# Altium PCB ECG 28.PcbDoc
Units mm, origin at the board's own origin, x right, y up, seen from the top; angles counter-clockwise.
Board outline 100 x 75 mm, 4 copper layers (Top Signal Layer, Power, GND, Bottom Signal Layer), stack 1.57 mm thick; 86 components, 53 nets, 215 pads, 0 vias.
Unrouted connection lines stored in the file: 25.
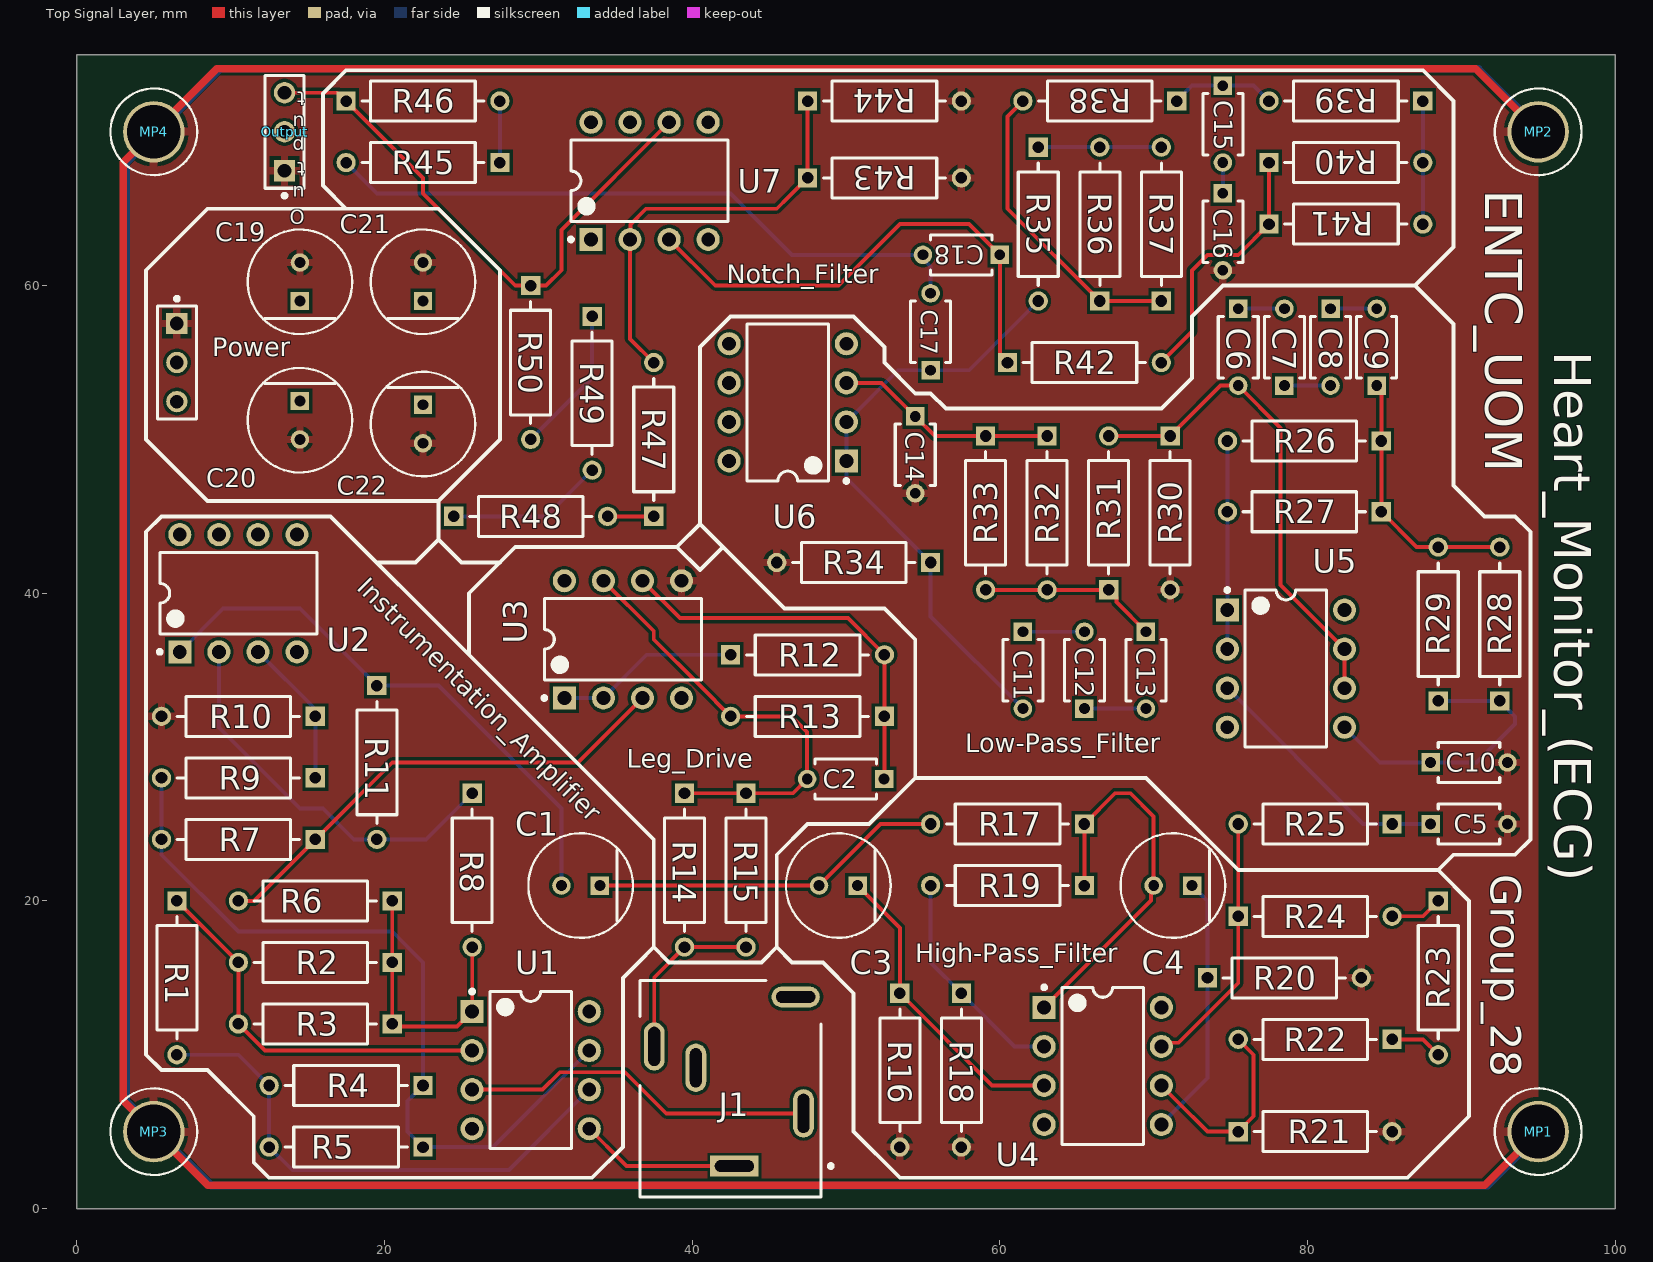
[diagram p0: Top Signal Layer view]
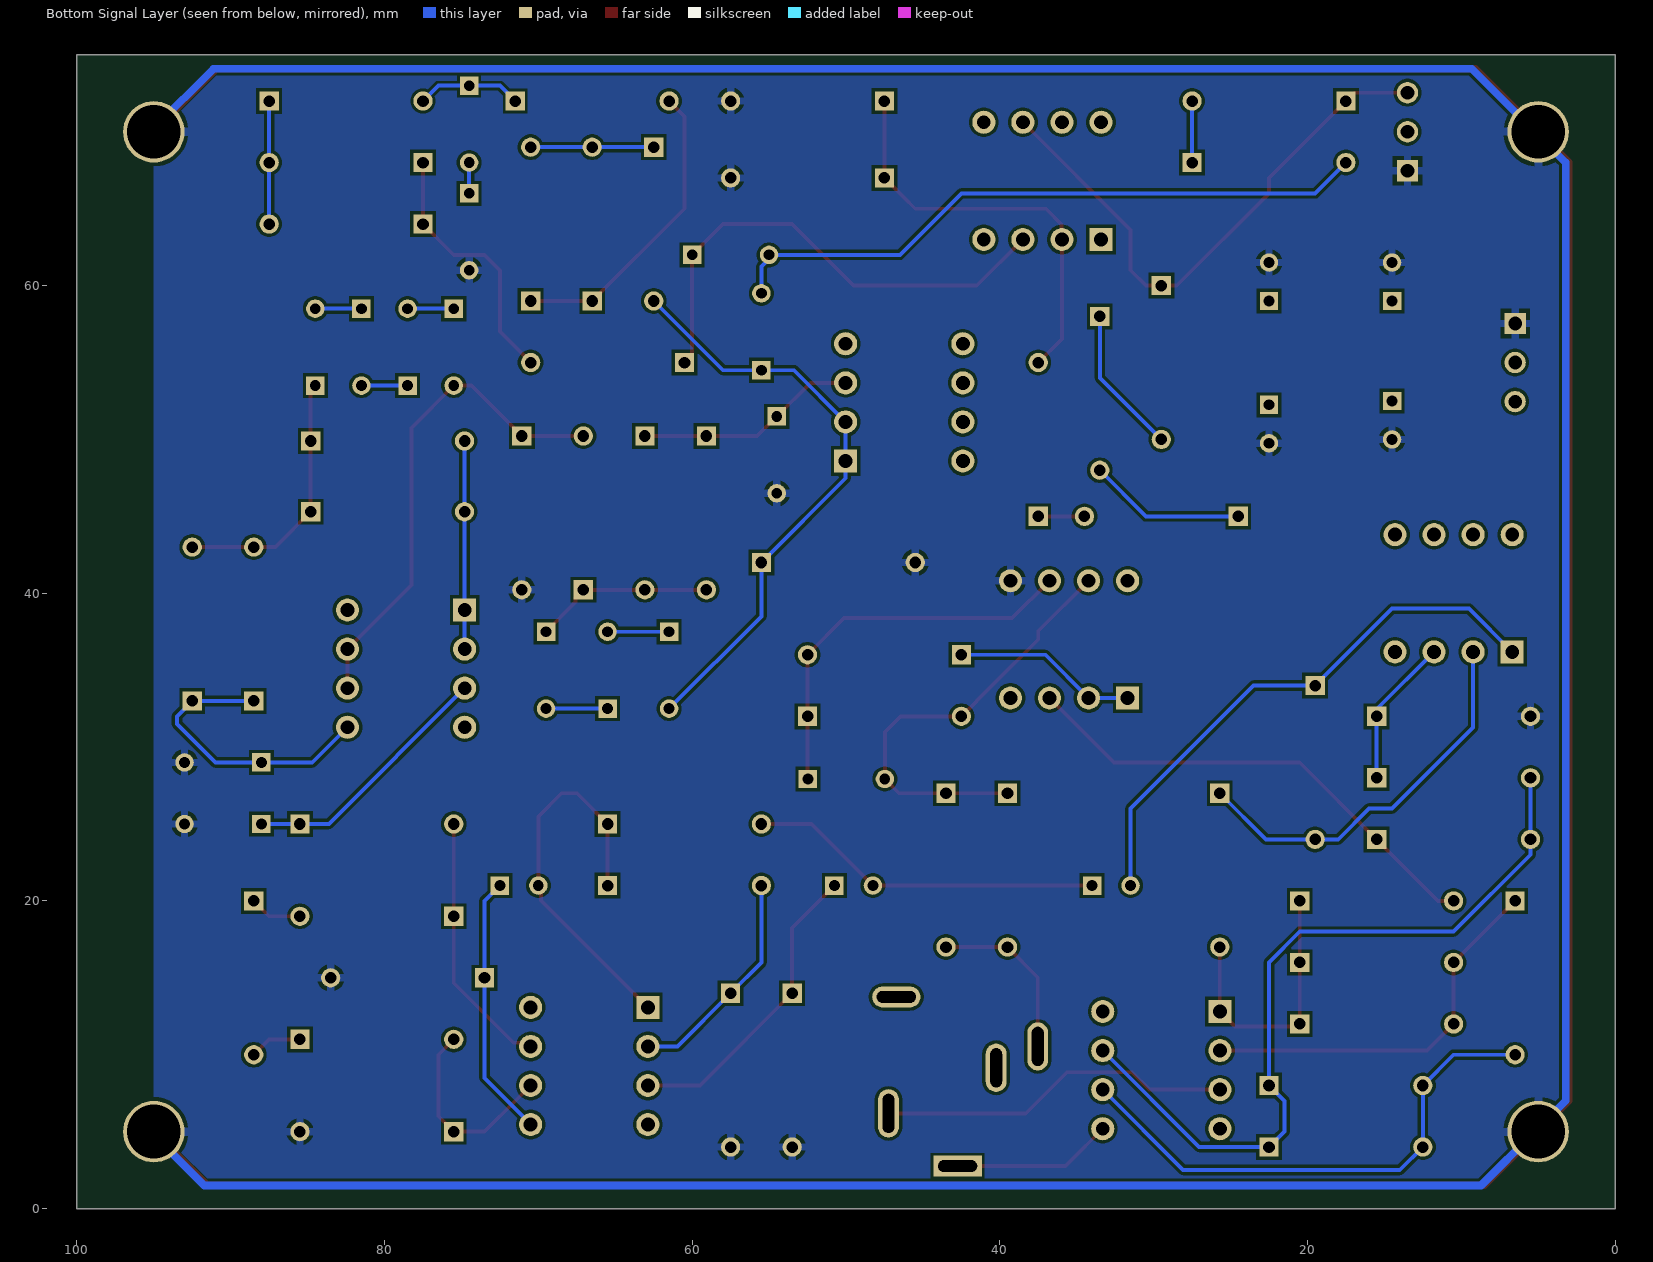
[diagram p1: Bottom Signal Layer view, seen from below]
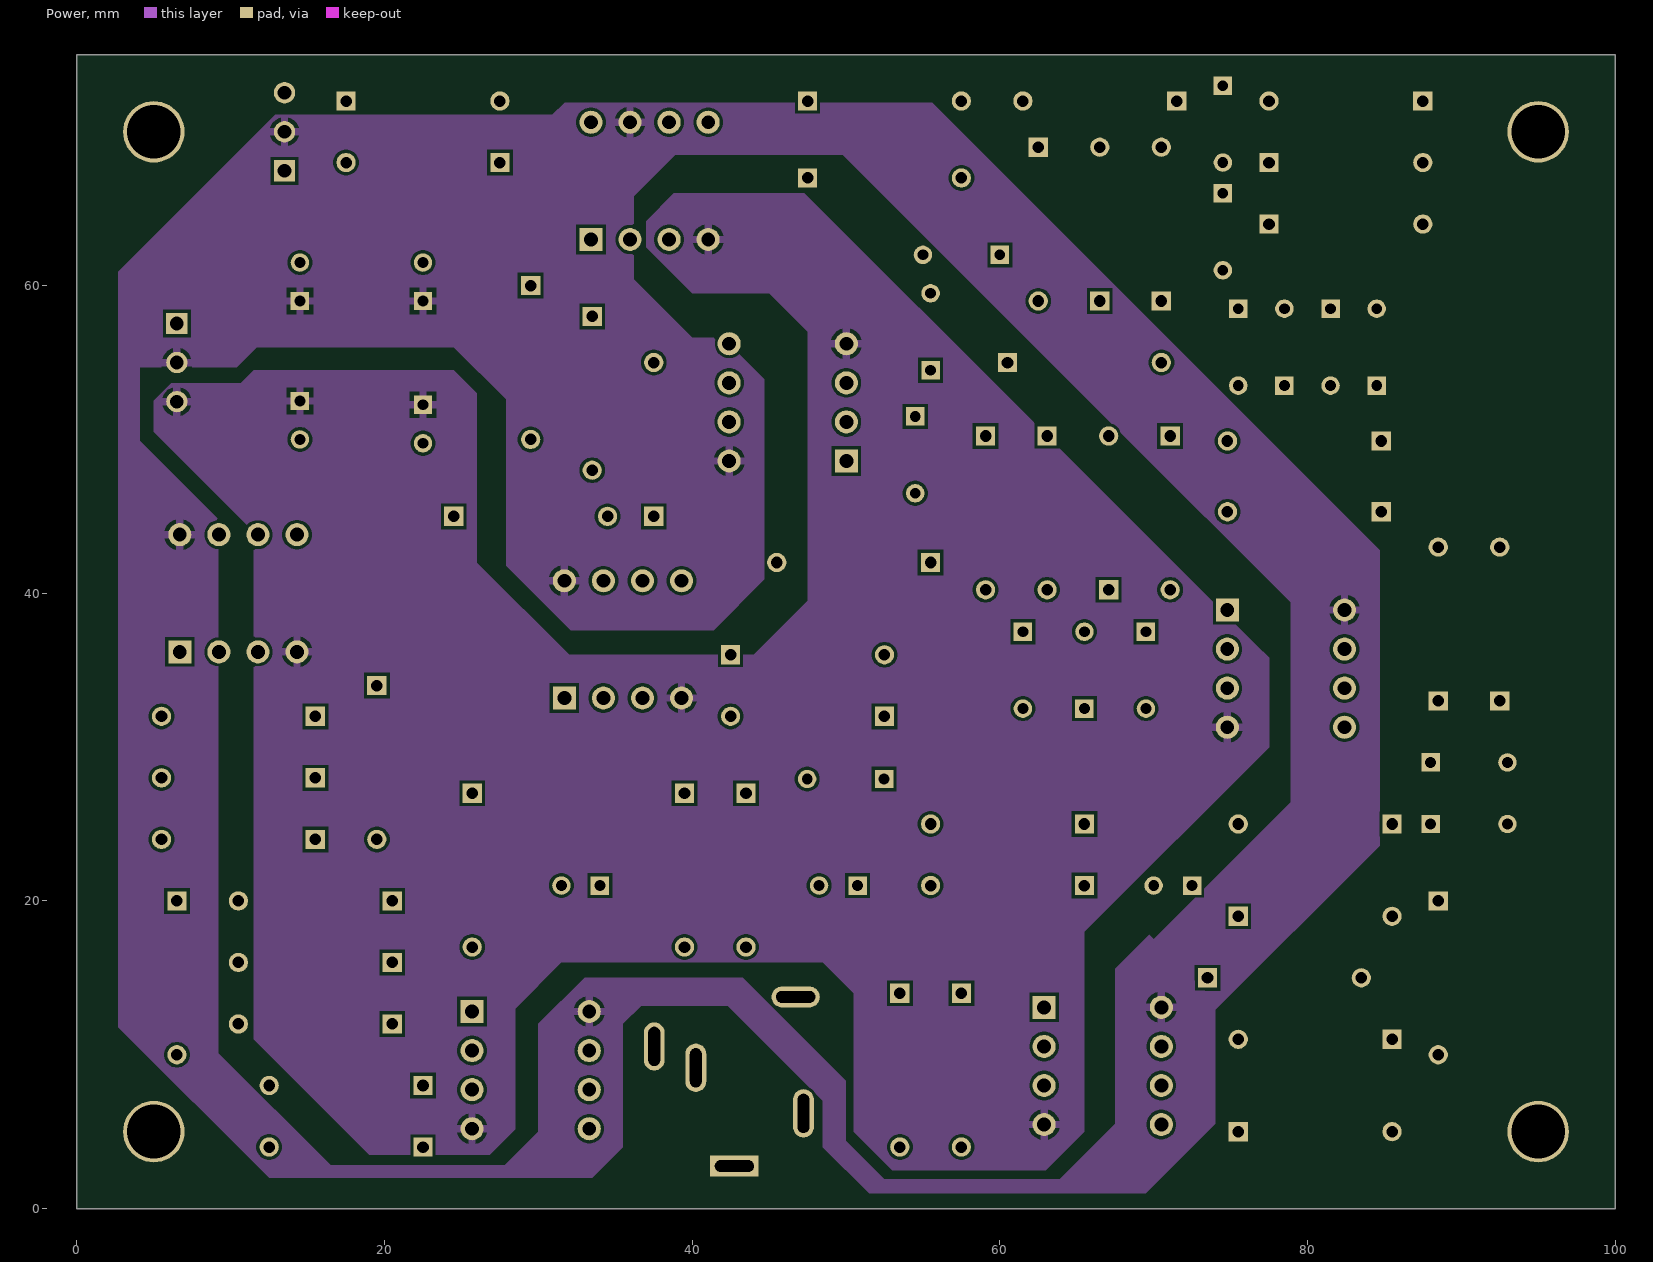
[diagram p2: Power]
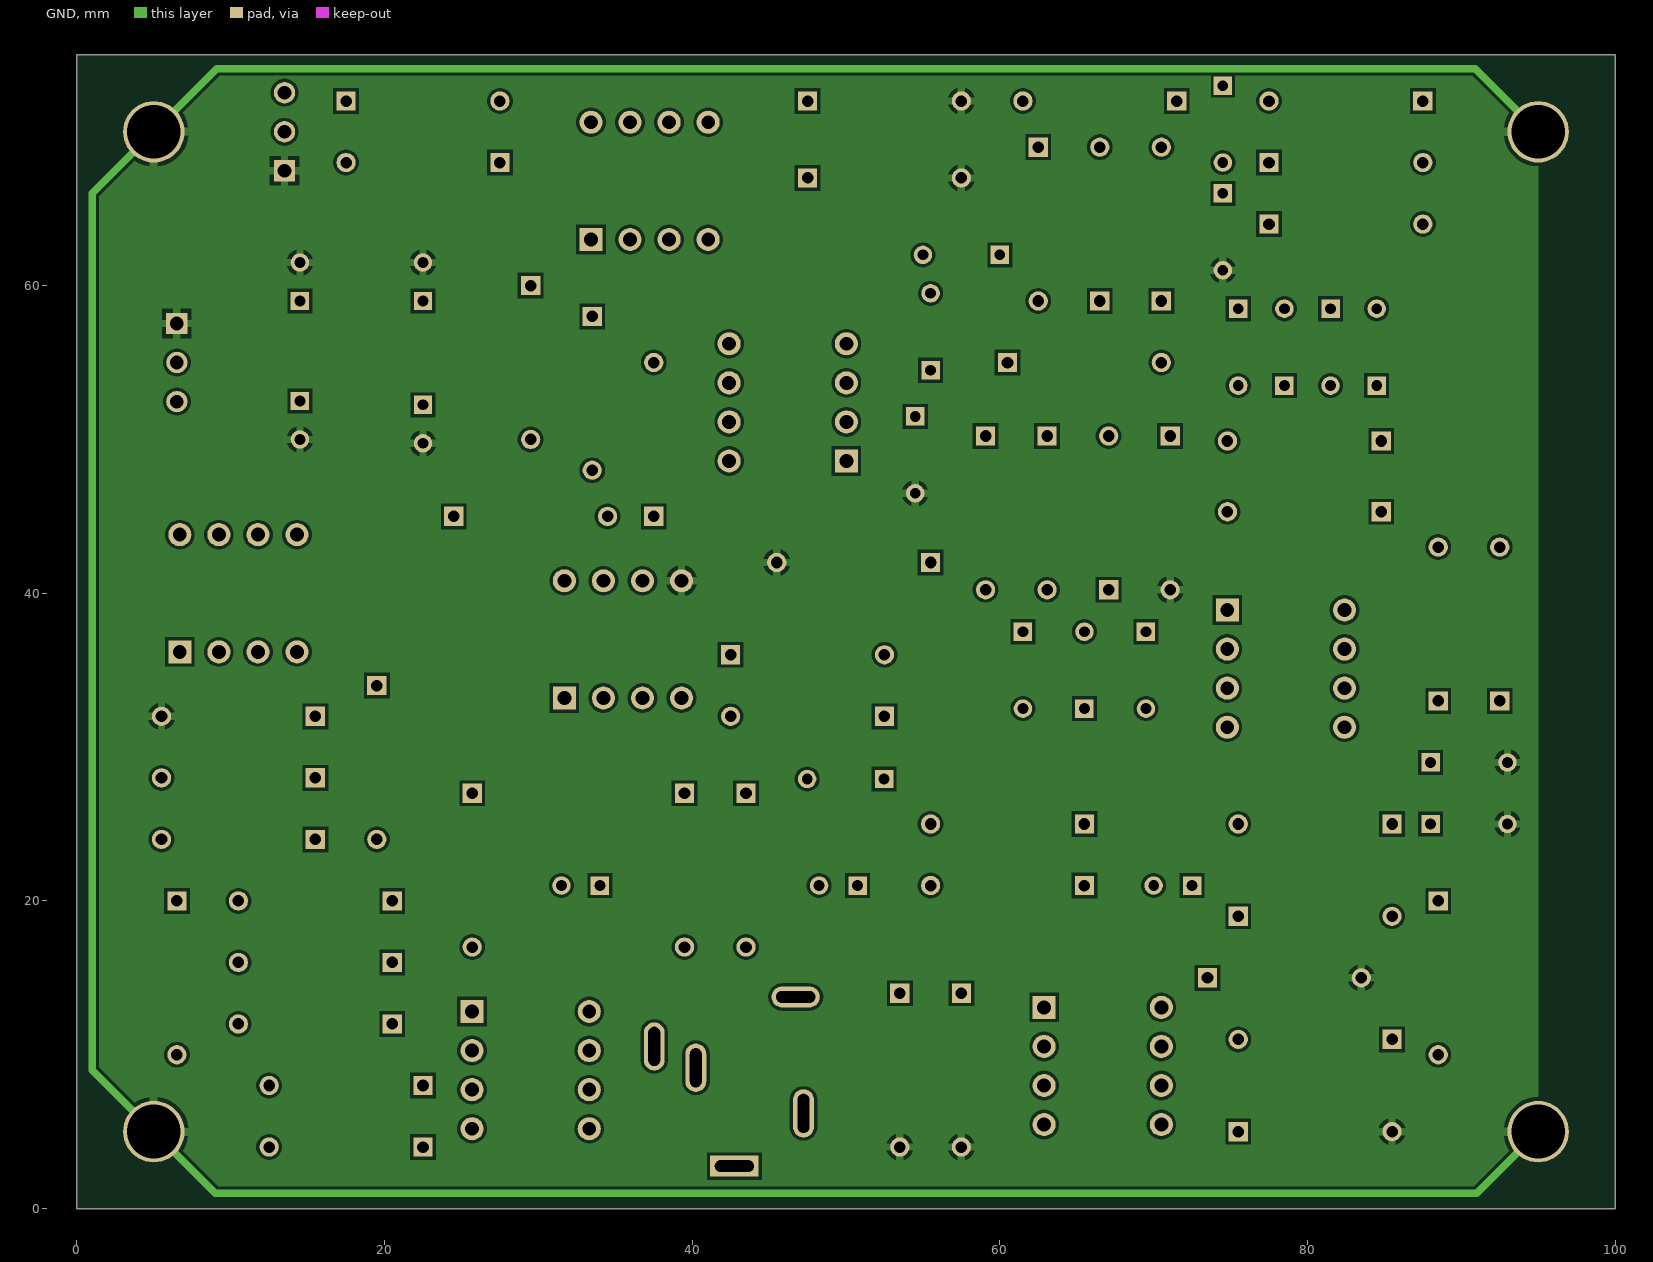
[diagram p3: GND]
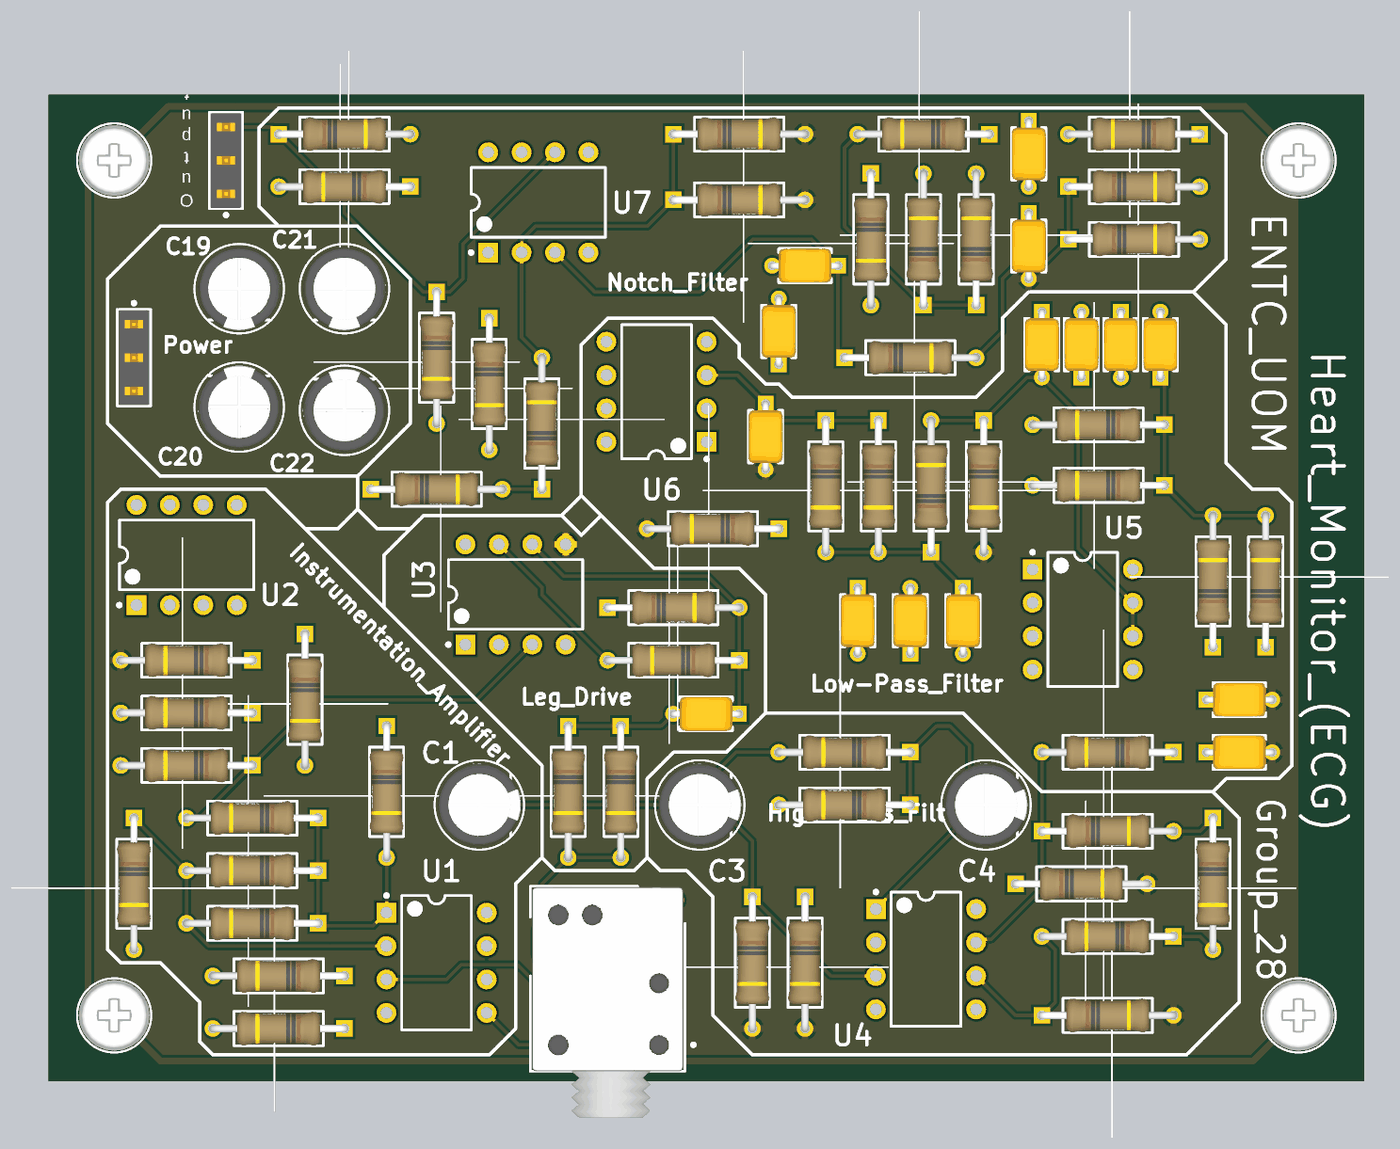
[diagram p4: 3D render of the assembled board from above, using the file's embedded part models]

## Layer stack, top to bottom
Top Solder: solder mask 0.0127, Solder Resist, Dk 3.8
Top Signal Layer: signal copper 0.035
Dielectric 1: prepreg 0.2, 7628, Dk 4.6
Power: signal copper 0.0175
Core: core 1.065, FR-4, Dk 4.5
GND: signal copper 0.0175
Dielectric 2: prepreg 0.2, 7628, Dk 4.6
Bottom Signal Layer: signal copper 0.035
Bottom Solder: solder mask 0.0127, Solder Resist, Dk 3.8

## Board outline
0,0 100,0 100,75 0,75

## Design rules (kind name [scope] priority, off if disabled: settings)
BoardOutlineClearance [All] p1: gap=0.2 ignorepadtopadclearanceinfootprint=FALSE except(0.4: Arc-SplitBarrior Arc-SplitContinuation Track-SplitBarrior Track-SplitContinuation SMDPad-SplitBarrior SMDPad-SplitContinuation THPad-SplitBarrior THPad-SplitContinuation Via-SplitBarrior Via-SplitContinuation Fill-SplitBarrior Fill-SplitContinuation Poly-SplitBarrior Poly-SplitContinuation Region-SplitBarrior Region-SplitContinuation Text-SplitBarrior Text-SplitContinuation)
Clearance "Clearance Bottom Layer" [OnLayer('Bottom Layer')] p1: gap=0.203 ignorepadtopadclearanceinfootprint=TRUE except(0.254: Arc-Text Track-Text SMDPad-Text THPad-Text Via-Text Fill-Text Poly-Text Region-Text Text-Text)
Clearance "Clearance Top Layer" [OnLayer('Top Layer')] p2: gap=0.203 ignorepadtopadclearanceinfootprint=TRUE except(0.254: Arc-Text Track-Text SMDPad-Text THPad-Text Via-Text Fill-Text Poly-Text Region-Text Text-Text)
Clearance [All] p3: gap=0.2 ignorepadtopadclearanceinfootprint=FALSE except(0.089: Arc-Arc Arc-Track Arc-SMDPad Track-Track Track-SMDPad SMDPad-SMDPad; 0.127: Arc-Via Track-Via SMDPad-Via THPad-Via Via-Via; 0.254: Arc-Text Track-Text SMDPad-Text THPad-Text Via-Text Fill-Text Poly-Text Region-Text Text-Text)
HoleSize [All] p1: absolutevalues=TRUE maxlimit=6.3 minlimit=0.2 maxpercent=80.000 minpercent=20.000
MinimumAnnularRing [All] p1: minimumring=0.076
MinimumSolderMaskSliver [All] p1: minsoldermaskwidth=0.1
PolygonConnect PolygonConnect_1 [All] p1: thpad.connectstyle=Relief thpad.reliefconductorwidth=0.508 thpad.reliefentries=4 thpad.polygonreliefangle="90 Angle" thpad.airgapwidth=0.254 smdpad.connectstyle=Relief smdpad.reliefconductorwidth=0.508 smdpad.reliefentries=4 smdpad.polygonreliefangle="90 Angle" smdpad.airgapwidth=0.254 via.connectstyle=Direct via.reliefconductorwidth=0.508 via.reliefentries=4 via.polygonreliefangle="90 Angle" via.airgapwidth=0.254
RoutingCorners [All] p1: cornerstyle=Round minsetback=2.54 maxsetback=2.54
RoutingVias [All] p1: holewidth=0.5 width=1 viastyle="Through Hole" minholewidth=0.2 minwidth=0.45 maxholewidth=1 maxwidth=2
SilkToSilkClearance [All] p1: silktosilkclearance=0.1
SilkToSolderMaskClearance [IsPad] p1: minsilkscreentomaskgap=0.1 clearancetoexposedcopper=TRUE
SolderMaskExpansion [All] p1: expansion=0.102 istentingtop=FALSE
Width [All] p1: maxlimit=2.54 minlimit=0.089 preferedwidth=0.381
25 further rules are at their usual default settings.

## Classes and differential pairs
component class notch+out: C15 C16 C17 C18 O R35 R36 R37 R38 R39 R40 R41 R42 R43 R44 R45 R46 R47 R48 R49 R50 U7
component class LowPassFilter: C5 C6 C7 C8 C9 C10 C11 C12 C13 C14 R25 R26 R27 R28 R29 R30 R31 R32 R33 R34 U5 U6
component class legdrive: C2 R12 R13 R14 R15 U3
component class InstrumentalAmplifier+in: C1 C19 C20 C21 C22 J1 MP1 MP2 MP3 MP4 Power R1 R2 R3 R4 R5 R6 R7 R8 R9 R10 R11 U1 U2
component class HighPassFilter: C3 C4 R16 R17 R18 R19 R20 R21 R22 R23 R24 U4

## Components (designator, comment, footprint, x,y, rotation, side; value= is the part's Value field where it differs from the comment)
C1 "100uF" FP-RAD-TH-D_6_3_0_5-L_11-MFG 32.75,21 r180 top
C2 ".1uF" FP-K15H5-MFG 49.975,27.925 r180 top
C3 "100uF" FP-RAD-TH-D_6_3_0_5-L_11-MFG 49.5,21 r180 top
C4 "100uF" FP-RAD-TH-D_6_3_0_5-L_11-MFG 71.25,21 r180 top
C5 ".1uF" FP-K15H5-MFG 90.5,25 r0 top
C6 ".1uF" FP-K15H5-MFG 75.5,56 r270 top
C7 ".1uF" FP-K15H5-MFG 78.5,56 r90 top
C8 ".1uF" FP-K15H5-MFG 81.5,56 r270 top
C9 ".1uF" FP-K15H5-MFG 84.5,56 r90 top
C10 ".1uF" FP-K15H5-MFG 90.5,29 r0 top
C11 ".1uF" FP-K15H5-MFG 61.5,35 r270 top
C12 ".1uF" FP-K15H5-MFG 65.5,35 r90 top
C13 ".1uF" FP-K15H5-MFG 69.5,35 r270 top
C14 ".1uF" FP-K15H5-MFG 54.5,49 r270 top
C15 ".1uF" FP-K15H5-MFG 74.5,70.5 r270 top
C16 ".1uF" FP-K15H5-MFG 74.5,63.5 r270 top
C17 ".1uF" FP-K15H5-MFG 55.5,57 r90 top
C18 ".1uF" FP-K15H5-MFG 57.5,62 r180 top
C19 "100uF" FP-RAD-TH-D_6_3_0_5-L_11-MFG 14.5,60.25 r90 top
C20 "100uF" FP-RAD-TH-D_6_3_0_5-L_11-MFG 14.5,51.25 r270 top
C21 "100uF" FP-RAD-TH-D_6_3_0_5-L_11-MFG 22.5,60.25 r90 top
C22 "100uF" FP-RAD-TH-D_6_3_0_5-L_11-MFG 22.5,51 r270 top
J1 "35RAPC3BH3" FP-35RAPC3BH3-MFG 42.5,6 r90 top
MP1 "9901" FP-9901-MFG 95,5 r0 top
MP2 "9901" FP-9901-MFG 95,70 r0 top
MP3 "9901" FP-9901-MFG 5,5 r0 top
MP4 "9901" FP-9901-MFG 5,70 r0 top
Output "87224-3" FP-87224-3-MFG 13.5,70 r90 top
Power "87224-3" FP-87224-3-MFG 6.5,55 r270 top
R1 "10K var" FP-CFR-25-MFG 6.5,15 r270 top
R2 "100K" FP-CFR-25-MFG 15.5,16 r180 top
R3 "100K" FP-CFR-25-MFG 15.5,12 r180 top
R4 "100K" FP-CFR-25-MFG 17.5,8 r180 top
R5 "100K" FP-CFR-25-MFG 17.5,4 r180 top
R6 "1M" FP-CFR-25-MFG 15.5,20 r180 top
R7 "1M" FP-CFR-25-MFG 10.5,24 r180 top
R8 "10K" FP-CFR-25-MFG 25.7,22 r270 top
R9 "10K" FP-CFR-25-MFG 10.5,28 r180 top
R10 "10K" FP-CFR-25-MFG 10.5,32 r180 top
R11 "10K" FP-CFR-25-MFG 19.5,29 r270 top
R12 "15K" FP-CFR-25-MFG 47.5,36 r0 top
R13 "1M" FP-CFR-25-MFG 47.5,32 r180 top
R14 "1M" FP-CFR-25-MFG 39.5,22 r270 top
R15 "1M" FP-CFR-25-MFG 43.5,22 r270 top
R16 "27K" FP-CFR-25-MFG 53.5,9 r270 top
R17 "27K" FP-CFR-25-MFG 60.5,25 r180 top
R18 "10K" FP-CFR-25-MFG 57.5,9 r270 top
R19 "10K" FP-CFR-25-MFG 60.5,21 r180 top
R20 "27K" FP-CFR-25-MFG 78.5,15 r0 top
R21 "1K" FP-CFR-25-MFG 80.5,5 r0 top
R22 "10K var" FP-CFR-25-MFG 80.5,11 r180 top
R23 "10K" FP-CFR-25-MFG 88.5,15 r270 top
R24 "10K" FP-CFR-25-MFG 80.5,19 r0 top
R25 "10K" FP-CFR-25-MFG 80.5,25 r180 top
R26 "10K" FP-CFR-25-MFG 79.8,49.9 r180 top
R27 "10K" FP-CFR-25-MFG 79.8,45.3 r180 top
R28 "10K" FP-CFR-25-MFG 92.5,38 r90 top
R29 "10K" FP-CFR-25-MFG 88.5,38 r90 top
R30 "10K" FP-CFR-25-MFG 71.075,45.225 r270 top
R31 "10K" FP-CFR-25-MFG 67.075,45.225 r90 top
R32 "10K" FP-CFR-25-MFG 63.075,45.225 r270 top
R33 "10K" FP-CFR-25-MFG 59.075,45.225 r270 top
R34 "10K" FP-CFR-25-MFG 50.5,42 r180 top
R35 "27K" FP-CFR-25-MFG 62.5,64 r270 top
R36 "10K" FP-CFR-25-MFG 66.5,64 r90 top
R37 "10K" FP-CFR-25-MFG 70.5,64 r90 top
R38 "1K Var" FP-CFR-25-MFG 66.5,72 r180 top
R39 "1K Var" FP-CFR-25-MFG 82.5,72 r180 top
R40 "10K" FP-CFR-25-MFG 82.5,68 r0 top
R41 "10K" FP-CFR-25-MFG 82.5,64 r0 top
R42 "27K" FP-CFR-25-MFG 65.5,55 r0 top
R43 "10K" FP-CFR-25-MFG 52.5,67 r0 top
R44 "10K" FP-CFR-25-MFG 52.5,72 r0 top
R45 "10K var" FP-CFR-25-MFG 22.5,68 r180 top
R46 "15K" FP-CFR-25-MFG 22.5,72 r0 top
R47 "1K" FP-CFR-25-MFG 37.5,50 r90 top
R48 "1K" FP-CFR-25-MFG 29.5,45 r0 top
R49 "1K" FP-CFR-25-MFG 33.5,53 r270 top
R50 "1K" FP-CFR-25-MFG 29.5,55 r270 top
U1 "LM4562NA/NOPB" P0008A 29.5,9 r0 top
U2 "LM4562NA/NOPB" P0008A 10.5,40 r90 top
U3 "TL072CP" P0008A 35.5,37 r90 top
U4 "TL072CP" P0008A 66.69,9.27 r0 top
U5 "TL072CP" P0008A 78.6,35.1 r0 top
U6 "TL072CP" P0008A 46.215,52.41 r180 top
U7 "TL071CP" P0008A 37.23,66.81 r90 top

## Footprints (in the part's own frame and the unit in brackets; to place one, negate y for a bottom-side part, rotate by r counter-clockwise, add the part's x,y. Pads: shape width x height; smd on the part's side, far side on the other; paste and mask are expansions set on the pad)
FP-35RAPC3BH3-MFG [mm]
  rect 1.362x3.14 hole 2.54 slot 0.762 at 0 deg paste-1000 mask+0: 1(-3.238,-0.241)
  rrect100% 3.14x1.362 hole 2.54 slot 0.762 at 90 deg paste-1000 mask+0: 2(4.541,4.966) 5(0.187,-4.735)
  rrect100% 1.362x3.14 hole 2.54 slot 0.762 at 0 deg paste-1000 mask+0: 4(7.76,-4.229)
  silkscreen extent -5.25,-6.64 8.81,5.88, body extent -8.91,-5.98 8.91,5.98, height 0.25
FP-9901-MFG [mm]
  round 4 hole 3.5 paste-1000 mask+0: ""(0,0)
  silkscreen extent -2.82,-2.82 2.82,2.82, body extent -2.92,-2.92 2.92,2.92, height 0.25
FP-87224-3-MFG [mil]
  rect 54.69x54.69 hole 35 paste-39370.1 mask+0: 1(-100,0)
  round 54.69 hole 35 paste-39370.1 mask+0: 2(0,0) 3(100,0)
  silkscreen extent -168,-50 145,50, body extent -148,-54 148,54, height 10
FP-CFR-25-MFG [mm]
  rect 1.25x1.25 hole 0.75 paste-1000 mask+0: 1(-5,0)
  round 1.25 hole 0.75 paste-1000 mask+0: 2(5,0)
  silkscreen extent -3.98,-1.3 3.97,1.3, body extent -5.72,-1.4 5.72,1.4, height 0.25
FP-K15H5-MFG [mm]
  rect 1.2x1.2 hole 0.7 paste-1000 mask+0: 1(-2.5,0)
  round 1.2 hole 0.7 paste-1000 mask+0: 2(2.5,0)
  silkscreen extent -2,-1.3 2,1.3, body extent -3.2,-1.4 3.2,1.4, height 0.25
FP-RAD-TH-D_6_3_0_5-L_11-MFG [mm]
  rect 1.2x1.2 hole 0.7 paste-1000 mask+0: 1(-1.25,0)
  round 1.2 hole 0.7 paste-1000 mask+0: 2(1.25,0)
  silkscreen extent -3.4,-3.4 3.4,3.4, body extent -3.5,-3.5 3.5,3.5, height 0.25
P0008A [mm] "DIP, 8-Leads, Body 10.15x6.6mm, Pitch 2.54mm"
  rect 1.5x1.5 hole 0.9: 1(-3.81,3.81)
  round 1.5 hole 0.9: 2(-3.81,1.27) 3(-3.81,-1.27) 4(-3.81,-3.81) 5(3.81,-3.81) 6(3.81,-1.27) 7(3.81,1.27) 8(3.81,3.81)
  silkscreen extent -3.93,-5.1 2.65,5.23, body extent -3.95,-5.07 3.95,5.07, height 5.08

## Part data
C1 C3 C4 C19 C20 C21 C22: library part CMP-05427-000237-1, "Aluminum Electrolytic Capacitors (Radial Lead Type) 4.7uF ±20% 160V", Capacitance=4.7uF, Case/Package=Radial, Dielectric Material=Aluminium, Max Operating Temperature=105°C, Min Operating Temperature=-25°C, Package Quantity=200, Ripple Current=43mA, Tolerance=20%, Voltage=160V, Construction=RADIAL, Diameter=6.3mm, Dissipation Factor=0.15%, Height=11.2mm, Height - Seated (Max)=0.48inch, Lead Diameter=0.5mm, Lead Free="Lead Free", Lead Pitch=2.5mm, Lead/Base Style=Straight, Length=11.2mm, Life (Hours)=2000Hour, Mount="Through Hole", Number of Pins=2, Packaging=Bulk, Radiation Hardening=No, REACH SVHC="No SVHC", Ripple Current (AC)=43mA, RoHS Compliant=Yes, Series=NHG, Termination=Radial, Voltage Rating=160V, Voltage Rating (DC)=160V, Weight=0.01lb, Width=0.25inch
C2 C5 C6 C7 C8 C9 C10 C11 C12 C13 C14 C15 C16 C17 C18: library part CMP-02417-000048-1, "CAP CER 0.1UF 50V X7R RADIAL", Capacitance=100nF, Case/Package=Dipped, Dielectric=X7R, Max Operating Temperature=125°C, Min Operating Temperature=-55°C, Package Quantity=5000, Tolerance=10%, Voltage=50V, Construction=RADIAL, Depth=2.5mm, Diameter=500um, Height=4mm, Height - Seated (Max)=0.1inch, Lead Diameter=0.5mm, Lead Length=30mm, Lead Pitch=5mm, Lead/Base Style="Formed Leads", Length=4mm, Mount="Through Hole", Packaging=Bulk, Radiation Hardening=No, RoHS Compliant=Yes, Series=K, Termination=Radial, Thickness=2.6mm, Voltage Rating=50V, Voltage Rating (DC)=50V, Weight=0.005644oz, Width=2.5mm
J1: library part CMP-47983-000003-1, "CONN JACK STEREO 3.5MM R/A", Body Color=Black, Package Quantity=1, Voltage Rating=500V, Body Material=Brass, Color=Black, Contact Material="Copper Alloy", Contact Plating=Silver, Gender=Female, Housing Material=PBT, Lead Free="Lead Free", Mount="Through Hole", Number of Ports=1, Number of Positions=3, Number of Terminals/Pins=3, Orientation="Right Angle", Packaging=Bulk, RoHS Compliant=Yes, Series=35, Shielding=Unshielded, Termination=Solder
MP1 MP2 MP3 MP4: library part CMP-19664-000002-1, "MACHINE SCREW PAN PHILLIPS 4-40", Package Quantity=100, Head Height=0.065inch, Lead Free="Lead Free", Length=0.44inch, Material="Stainless Steel", Mount=Screw, Outside Diameter=0.212inch, Series=-, Thread Size=#4-40
Output Power: library part CMP-2000-05697-2, "CONN HEADER VERT 3POS 2.54MM", Color=Black, Contact Current Rating=3A, Flammability Rating="UL94 V-0", High Temperature Housing=No, Max Operating Temperature=105°C, Min Operating Temperature=-65°C, Package Quantity=520, Approvals=CSA, Board Standoff="No (Without)", Connector Type=Plug, Contact Gender=Male, Contact Material=Bronze, Contact Mating Length=8.08mm, Contact Plating=Gold, Contact Post Length=0.125inch, Contact Protection="No (Without)", Contact Shape=Square, Contact Type="Male Pin", Current Rating=3A, Depth=2.54mm, ELV=Compliant, Gasket="No (Without)", High Speed Serial Data Connector=No, Housing Color=Black, Housing Material=Thermoplastic, Keyed=No, Lead Free="Lead Free", Length=7.21mm, Mating Alignment="No (Without)", Mating Connector Lock="No (Without)", Mount="Through Hole", Number of Contacts=3, Number of Positions=3, Number of Rows=1, Orientation=Straight, Packaging=Carton, PCB Mount Retention=Without, PCB Mounting Orientation=Vertical, PCB Thickness=1.397mm, Pitch=2.54mm, Radiation Hardening=No, RoHS Compliant=Yes, Row Spacing=2.54mm, Selectively Loaded="No (Without)", Series="AMPMODU MOD II", Stabilizers="No (Without)", Strain Relief="No (Without)", Termination="Through Hole"
R1 R2 R3 R4 R5 R6 R7 R8 R9 R10 R11 R12 R13 R14 R15 R16 R17 R18 R19 R20 R21 R22 R23 R24 R25 R26 R27 R28 R29 R30 R31 R32 R33 R34 R35 R36 R37 R38 R39 R40 R41 R42 R43 R44 R45 R46 R47 R48 R49 R50: library part CMP-03413-000009-1, "RES 10 OHM 1/4W 5% AXIAL", Case/Package=Axial, Max Operating Temperature=155°C, Max Power Dissipation=250mW, Min Operating Temperature=-55°C, Package Quantity=200, Resistance=10R, Resistor Type="Carbon Film", Temperature Coefficient=500ppm/°C, Tolerance=5%, Length=0.248inch, Number of Terminations=2, Packaging=Bulk, RoHS Compliant=Yes, Series="Carbon Film"
U1 U2: library part CMP-0057-00042-3, "Dual High Performance, High Fidelity Audio Operational Amplifier, 8-pin MDIP, Pb-Free", Manufacturer="Texas Instruments", PackageTopMarking=NSUZXYTTE#*LM*4562NA, PowerWise=Y, Code_JEDEC=MS-001-BA, ComponentLink1Description="Datasheet URL", ComponentLink1URL=http://www.ti.com/general/docs/lit/getliterature.tsp?genericPartNumber=LM4562&fileType=pdf, CompType="Audio IC", PackageDescription="MDIP, .365 x .250 x .130in, 8 Lead, .100in Pitch", PackageReference=P0008A, PinCount=8, RoHS=Y
U3 U4 U5 U6: library part CMP-0017-00950-2, "Dual Low-Noise JFET-Input General-Purpose Operational Amplifier, 7 to 36 V, 0 to 70 degC, 8-pin DIP (P8), Pb-Free (RoHS)", Manufacturer="Texas Instruments", Rating=Catalog, Total Supply Voltage(Max)(+5V is 5, +/-5V is 10)=36, Total Supply Voltage(Min)(+5V is 5, +/-5V is 10)=7, CMRR(Min)(dB)=70, Code_JEDEC=MS-001, ComponentLink1Description="Manufacturer URL", ComponentLink1URL=http://www.ti.com/, ComponentLink2Description=Datasheet, ComponentLink2URL=http://www.ti.com/lit/ds/symlink/tl072.pdf, ComponentLink3Description="Package Specification", ComponentLink3URL=http://www.ti.com/litv/pdf/mpdi001b, DatasheetVersion=SLOS080J, Eco-Plan="Pb-Free (RoHS)", GBW(Typ)(MHz)=3, IIB(Max)(pA)=200, Iq per channel(Max)(mA)=2.5, Mounting Technology="Through Hole", Number of Channels=2, Offset Drift(Typ)(uV/C)=18, PackageDescription="8-Pin Plastic In-Line, Body 9.59 x 6.35 mm, Pitch 2.54 mm", PackageReference=P0008A, PackageVersion="4040082/E, 04/2010", PartNumber=TL072CP, Slew Rate(Typ)(V/us)=13, Sub Family="General Purpose Amplifier, High Supply Voltage Amplifier (>=30V)", Vio (25C)(Max)(mV)=10, Vn at 1kHz(Typ)(nV/rtHz)=18
U7: library part CMP-0017-00972-2, "Low-Noise JFET-Input General-Purpose Operational Amplifier, 7 to 36 V, 0 to 70 degC, 8-pin DIP (P8), Pb-Free (RoHS)", Manufacturer="Texas Instruments", Rating=Military, Supplier Part Number 1=296-1775-5-ND, Total Supply Voltage(Max)(+5V is 5, +/-5V is 10)=36, Total Supply Voltage(Min)(+5V is 5, +/-5V is 10)=7, CMRR(Min)(dB)=70, Code_JEDEC=MS-001, ComponentLink1Description="Manufacturer URL", ComponentLink1URL=http://www.ti.com/, ComponentLink2Description=Datasheet, ComponentLink2URL=http://www.ti.com/lit/ds/symlink/tl071.pdf, ComponentLink3Description="Package Specification", ComponentLink3URL=http://www.ti.com/litv/pdf/mpdi001b, DatasheetVersion=SLOS080J, Eco-Plan="Pb-Free (RoHS)", GBW(Typ)(MHz)=3, IIB(Max)(pA)=200, Iq per channel(Max)(mA)=2.5, Mounting Technology="Through Hole", Number of Channels=1, Offset Drift(Typ)(uV/C)=18, PackageDescription="8-Pin Plastic In-Line, Body 9.59 x 6.35 mm, Pitch 2.54 mm", PackageReference=P0008A, PackageVersion="4040082/E, 04/2010", PartNumber=TL071CP, Slew Rate(Typ)(V/us)=13, Sub Family="General Purpose Amplifier, High Supply Voltage Amplifier (>=30V)", Supplier 1=Digi-Key, Vio (25C)(Max)(mV)=10, Vn at 1kHz(Typ)(nV/rtHz)=18

## Free pads (board coordinates)
  rrect100% 1.362x3.14 hole 2.54 slot 0.762 at 0 deg paste-1000 mask+0: 13(40.238,9.152)

## Nets (pads, with @x,y where several pads share a name; then routed paths per layer and width w, separated by ;. In a path a pad name is that pad's centre, name@x,y a point inside that pad or via, vN(x,y) a via of type N, cw(c..) or ccw(c..) an arc to the next point about the centre after c; other vN are vias at no path point)
+Vcc: C19.1 C21.1 Output.2 Power.2 U1.8 U2.8 U3.8 U4.8 U5.8 U6.8 U7.7
-Vcc: C20.1 C22.1 Power.3 U1.4 U2.4 U3.4 U4.4 U5.4 U6.4 U7.4
GND: C5.2 C10.2 C14.2 C16.2 C19.2 C20.2 C21.2 C22.2 MP1. MP2. MP3. MP4. Output.1 Power.1 R10.2 R16.2 R18.2 R20.2 R21.2 R30.2 R34.2 R43.2 R44.2 U3.5 | length 760.9
  Top Signal Layer w0.5: MP3.@5,5.038 3.019,7.019 3.019,68.019 9.104,74.104 90.934,74.104 MP2.@95,70.038 ; MP3.@5.038,5 8.519,1.519 91.519,1.519 MP1.
  GND w0.5: MP1. 91,1 9,1 MP3. 1,9 1,66 MP4. 9.104,74.104 90.896,74.104 MP2.
  Bottom Signal Layer w0.5: MP1. 95,4.782 91.718,1.5 8.718,1.5 5.218,5 MP3. 5,5.218 3.218,7 3.218,68 5,69.782 MP4. 5.218,70 9.322,74.104 91.114,74.104 95,70.218 MP2.
"high pass out": R24.1 R25.2 U4.7 | length 17
  Top Signal Layer w0.254: U4.7 70.738,10.778 71.619,10.778 75.5,14.659 R24.1 R25.2
InstrumentalOut: C1.1 C3.2 R17.2 | length 23.2
  Top Signal Layer w0.254: C1.1 C3.2 52.25,25 R17.2
LA: J1.5 U1.3 | length 23.1
  Top Signal Layer w0.254: U1.3 30.268,7.73 31.399,8.861 35.639,8.861 38.313,6.187 J1.5
LegIn: R6.2 R7.1 U3.3 | length 31.7
  Top Signal Layer w0.254: R6.2 10.506,20.006 11.506,20.006 R7.1 20.5,29 32.58,29 U3.3
LL: J1.2 R14.2 R15.2 | length 11.3
  Top Signal Layer w0.254: J1.2 37.534,15.034 R14.2 R15.2
"low pass out": C11.2 C17.1 R34.1 R35.2 U6.1 U6.2 | length 39.1
  Bottom Signal Layer w0.254: C11.2 55.5,38.5 R34.1 50.025,47.475 U6.1 U6.2 53.385,54.5 C17.1 58,54.5 R35.2
NetC1_2: C1.2 R11.1 U2.1 | length 36.4
  Bottom Signal Layer w0.254: U2.1 9.5,39 14.5,39 R11.1 23.5,34 31.5,26 C1.2
NetC2_1: C2.1 R12.2 R13.1 U3.6 | length 25.8
  Top Signal Layer w0.254: U3.6 39.199,38.381 50.119,38.381 R12.2 R13.1 52.5,27.95 C2.1
NetC2_2: C2.2 R13.2 R14.1 R15.1 U3.7 | length 29
  Top Signal Layer w0.254: U3.7 37.5,37.54 37.5,37 40.5,34 R13.2 46.45,32 47.475,30.975 C2.2 46.55,27 R15.1 R14.1
NetC3_1: C3.1 R16.1 U4.3 | length 20
  Top Signal Layer w0.254: C3.1 53.5,18.25 R16.1 59.5,8 U4.3
NetC4_1: C4.1 R20.1 U4.5 | length 17.2
  Bottom Signal Layer w0.254: U4.5 70.5,5.5 73.5,8.5 R20.1 73.5,20 C4.1
NetC4_2: C4.2 R17.1 R19.1 U4.1 | length 25.3
  Top Signal Layer w0.254: U4.1 69.819,20.019 69.819,20.819 C4.2 70,25.5 68.5,27 67.5,27 R17.1 R19.1
NetC5_1: C5.1 R25.1 U5.3 | length 16.9
  Bottom Signal Layer w0.254: U5.3 83.62,25 R25.1 C5.1
NetC6_1: C6.1 C7.2 | length 3
  Bottom Signal Layer w0.254: C6.1 C7.2
NetC6_2: C6.2 R30.1 R31.2 U5.6 U5.7 | length 32.3
  Top Signal Layer w0.254: R31.2 R30.1 74.35,53.5 C6.2 78.249,50.751 78.249,40.525 78.255,40.525 U5.7 U5.6
NetC7_1: C7.1 C8.2 | length 3
  Bottom Signal Layer w0.254: C7.1 C8.2
NetC8_1: C8.1 C9.2 | length 3
  Bottom Signal Layer w0.254: C8.1 C9.2
NetC9_1: C9.1 R26.1 R27.1 R28.2 R29.2 | length 17
  Top Signal Layer w0.254: C9.1 84.8,53.2 R26.1 R27.1 87.1,43 R29.2 R28.2
NetC10_1: C10.1 R28.1 R29.1 U5.5 | length 19
  Bottom Signal Layer w0.254: U5.5 84.7,29 C10.1 91,29 93.5,31.5 93.5,32 R28.1 R29.1
NetC11_1: C11.1 C12.2 | length 4
  Bottom Signal Layer w0.254: C11.1 C12.2
NetC12_1: C12.1 C13.2 | length 4
  Bottom Signal Layer w0.254: C12.1 C13.2
NetC13_1: C13.1 R31.1 R32.2 R33.2 | length 11.7
  Top Signal Layer w0.254: R33.2 R32.2 R31.1 67.573,39.727 67.573,39.427 C13.1
NetC14_1: C14.1 R32.1 R33.1 U6.3 | length 14.5
  Top Signal Layer w0.254: U6.3 52.32,53.68 C14.1 55.775,50.225 R33.1 R32.1
NetC15_1: C15.1 R38.1 R39.2 | length 6.8
  Bottom Signal Layer w0.254: R38.1 72.5,73 76.5,73 R39.2
NetC15_2: C15.2 C16.1 | length 2
  Bottom Signal Layer w0.254: C16.1 C15.2
NetC17_2: C17.2 C18.2 R45.2 | length 42.7
  Bottom Signal Layer w0.254: R45.2 19.5,66 42.5,66 46.5,62 C18.2 55,61.744 55.5,61.244 C17.2
NetC18_1: C18.1 R42.1 U7.3 | length 32.4
  Top Signal Layer w0.254: U7.3 41.5,60 49.5,60 53.5,64 58,64 C18.1 60,55.5 R42.1
NetR1_1: R1.1 R2.2 R3.2 U1.2 | length 25.6
  Top Signal Layer w0.254: R1.1 R2.2 10.5,13 R3.2 12.23,10.27 U1.2
NetR1_2: R1.2 R4.2 R5.2 U1.6 | length 34.4
  Bottom Signal Layer w0.254: R1.2 10.5,10 R4.2 R5.2 14,2.5 28.08,2.5 U1.6
NetR2_1: R2.1 R3.1 R6.1 R8.2 U1.1 | length 17.9
  Top Signal Layer w0.254: R6.1 R2.1 20.5,13 R3.1 20.672,11.828 24.708,11.828 25.7,12.82 R8.2
NetR4_1: R4.1 R5.1 R7.2 R9.2 U1.7 | length 51.1
  Bottom Signal Layer w0.254: R9.2 R7.2 5.5,23 10.5,18 20.5,18 22.5,16 R4.1 21.5,7 21.5,5 R5.1 27.04,4 U1.7
NetR8_1: R8.1 R11.2 U2.2 | length 25.6
  Bottom Signal Layer w0.254: U2.2 9.23,31.27 14.5,26 16,26 18,24 22.7,24 R8.1
NetR9_1: R9.1 R10.1 U2.3 | length 9.7
  Bottom Signal Layer w0.254: U2.3 15.5,32.46 R9.1
NetR12_1: R12.1 U3.1 U3.2 | length 12
  Bottom Signal Layer w0.254: U3.1 U3.2 37.04,36 R12.1
NetR18_1: R18.1 R19.2 U4.2 | length 14.6
  Bottom Signal Layer w0.254: R19.2 55.5,16 R18.1 60.96,10.54 U4.2
NetR21_1: R21.1 R22.2 U4.6 | length 13.1
  Top Signal Layer w0.254: U4.6 71.5,7 73.5,5 R21.1 76.5,6 76.5,8 76.5,10 R22.2
NetR22_1: R22.1 R23.2 | length 3.4
  Top Signal Layer w0.254: R22.1 87.5,11 R23.2
NetR23_1: R23.1 R24.2 | length 3.4
  Top Signal Layer w0.254: R24.2 87.5,19 R23.1
NetR26_2: R26.2 R27.2 U5.1 U5.2 | length 13.5
  Bottom Signal Layer w0.254: U5.2 74.795,36.375 74.795,49.895 R26.2
NetR35_1: R35.1 R36.2 R37.2 | length 8
  Bottom Signal Layer w0.254: R35.1 R36.2 R37.2
NetR36_1: R36.1 R37.1 R38.2 | length 19.9
  Top Signal Layer w0.254: R38.2 60.5,71 60.5,65 R36.1 R37.1
NetR39_1: R39.1 R40.2 R41.2 | length 8
  Bottom Signal Layer w0.254: R41.2 R40.2 R39.1
NetR40_1: R40.1 R41.1 R42.2 | length 17.1
  Top Signal Layer w0.254: R42.2 70.5,55.023 72.488,57.012 72.488,60.988 73.5,62 75.5,62 R41.1 R40.1
NetR43_1: R43.1 R44.1 R47.2 U7.2 | length 27.4
  Top Signal Layer w0.254: R47.2 35.96,56.54 U7.2 35.982,63.022 35.982,63.982 37,65 45.5,65 46.251,65.751 R43.1 R44.1
NetR45_1: R45.1 R46.2 | length 4
  Bottom Signal Layer w0.254: R45.1 R46.2
NetR47_1: R47.1 R48.2 | length 3
  Top Signal Layer w0.254: R48.2 R47.1
NetR48_1: R48.1 R49.2 | length 10.2
  Bottom Signal Layer w0.254: R48.1 30.5,45 R49.2
NetR49_1: R49.1 R50.2 | length 9.7
  Bottom Signal Layer w0.254: R50.2 33.5,54 R49.1
Output: Output.3 R46.1 R50.1 U7.6 | length 36.7
  Top Signal Layer w0.254: Output.3 16.96,72.54 R46.1 22.5,67 22.5,66 28.5,60 R50.1 30.5,60 31.5,61 31.5,63.62 U7.6
RA: J1.1 U1.5 | length 13.5
  Top Signal Layer w0.254: 35.5,3 U1.5 35.738,2.762 J1.1
pads on no net: J1.4 U2.5 U2.6 U2.7 U6.5 U6.6 U6.7 U7.1 U7.5 U7.8

## Polygon pours and split planes (outlines as drawn)
GND on Bottom Signal Layer "GND_L04_P013" (solid, pour order 13): 95,70 91,74 9,74 3,68 3,7 8.5,1.5 91.5,1.5 95,5
GND on GND "GND_L03_P008" (solid, pour order 8): 4.915,70.101 1,66.187 1,9 9.5,0.5 9,1 91,1 95,5 95,70 91,74 8.5,74 5,70.5 5,70
GND on Top Signal Layer "GND_L01_P014" (solid, pour order 14): 95,70 91,74 9,74 3,68 3,7 8.5,1.5 91.5,1.5 92,2 95,5
-Vcc on Power "-VCC_L02_P015" (solid, pour order 15): 5,52.5 6.15,53.65 10.65,53.65 11.5,54.5 24.5,54.5 26,53 26,42 32,36 44,36 47.5,39.5 47.5,57 45,59.5 40,59.5 37,62.5 37,64.2 38.8,66 47.3,66 77.5,35.8 77.5,30 65.5,18 65.5,5 63,2.5 53,2.5 50.5,5 50.5,14 48.5,16 31.5,16 28.5,13 28.5,5.15 26.85,3.5 19,3.5 11.5,11 11.5,44 5,50.5
+Vcc on Power "+VCC_L02_P019" (solid, pour order 19): 4.1,49.8 4.1,55.6 2.6,55.6 2.7,55.5 2.7,49.7 4,49.7
+Vcc on Power "+VCC_L02_P018" (solid, pour order 18): 69.2,16.7 73.5,12.4 84.7,23.6 84.7,42.8 55.6,71.9 31.7,71.9 30.9,71.1 12.9,71.1 2.7,60.9 2.7,54.7 10.4,54.7 11.7,56 24.5,56 27.9,52.6 27.9,41.8 32.1,37.6 41.4,37.6 44.7,40.9 44.7,53.9 42,56.6 40,56.6 36.2,60.4 36.2,65.8 38.9,68.5 49.8,68.5 78.9,39.4 78.9,26.4
+Vcc on Power "+VCC_L02_P017" (solid, pour order 17): 2.7,51.3 9.2,44.8 9.2,10.1 16.5,2.8 27.8,2.8 30,5 30,12 33,15 43.3,15 50,8.3 50,4.4 52.5,1.9 63.9,1.9 67.5,5.5 67.5,15.6 69.7,17.8 74,13.5 74,5.5 69.5,1 51.5,1 48.5,4 48.5,7 42.3,13.2 36.7,13.2 35.5,12 35.5,4 33.5,2 12.5,2 2.7,11.8

## Silkscreen, mask and mechanical layers (free items; w line width, h text height)
Top Overlay:
  lines w0.254: 18.5,65 17.5,65 16,66.5 16,72.5 17.5,74 87.5,74 89.5,72 89.5,62.5 87,60 ; 19.5,42 22,42 23.5,43.5 ; 27.5,42 25,42 23.5,43.5 ; 42.425,57.925 40.5,56 ; 46.5,39 52.5,39 54.5,37 54.5,28 ; 49.5,39 46,39 42,43 ; 84,60 87,60 ; 84.5,60 74.5,60 72.5,58 72.5,54 70.5,52 56.5,52 55.5,53 54.5,53 52.5,55 52.5,56 50.5,58 42.5,58 40.5,56 ; 15.5,45 16.5,45 25.5,36 ; 15.5,45 15.5,45 ; 15.5,45 5.5,45 4.5,44 4.5,10 5.5,9 8.5,9 11.5,6 11.5,3 12.5,2 33.5,2 35.5,4 35.5,15 36.5,16 ; 23.5,43.5 23.5,43.5 ; 23.5,43.5 23.5,46 ; 23.5,46 27.5,50 27.5,60 27.5,61 23.5,65 8.5,65 4.5,61 4.5,50 8.5,46 23.5,46 ; 25.5,36 37.5,24 37.5,17 ; 25.5,36 25.5,36 ; 25.5,36 25.5,38 25.5,40 28.5,43 30.5,43 38.5,43 39,43 ; 36.5,16 37.5,17 ; 36.5,16 36.5,16 ; 37.5,17 38.5,16 ; 38.5,16 44.5,16 ; 38.5,16 44.5,16 ; 39,43 40.5,44.5 ; 39,43 40.5,41.5 42,43 ; 40.5,44.5 40.5,45 ; 40.5,44.5 42,43 ; 40.5,45 40.5,45 ; 40.5,45 40.5,56 ; 44.5,16 45.5,17 ; 45.5,17 46.5,16 48.5,16 50.5,14 50.5,5 53.5,2 86.5,2 90.5,6 90.5,20 88.5,22 ; 45.5,17 45.5,23 47.5,25 51.5,25 54.5,28 ; 54.5,28 69.5,28 75.5,22 88.5,22 ; 87,60 89.5,57.5 89.5,47 91.5,45 93.5,45 94.5,44 94.5,24 93.5,23 89.5,23 88.5,22 ; 87,60 87,60
  text "O / u / t / p / u / t" at 14.817,72.854 h1.52 r180
  text "ENTC_UOM" at 91.554,66.246 h2.4 r270
  text "Notch_Filter" at 42.254,60.154 h1.2
  text "Heart_Monitor_(ECG)" at 96.054,55.746 h2.4 r270
  text "Instrumentation_Amplifier" at 18.142,40.283 h1.2 r315
  text "Low-Pass_Filter" at 57.754,29.654 h1.2
  text "Leg_Drive" at 35.754,28.654 h1.2
  text "Group_28" at 91.921,21.746 h2 r270
  text "High-Pass_Filter" at 54.5,16 h1.2
Mechanical 1:
  lines w0.254: 0.125,0.125 0.125,74.875 99.875,74.875 99.875,0.125 0.125,0.125